# Allegro board production_board2_rev1.brd
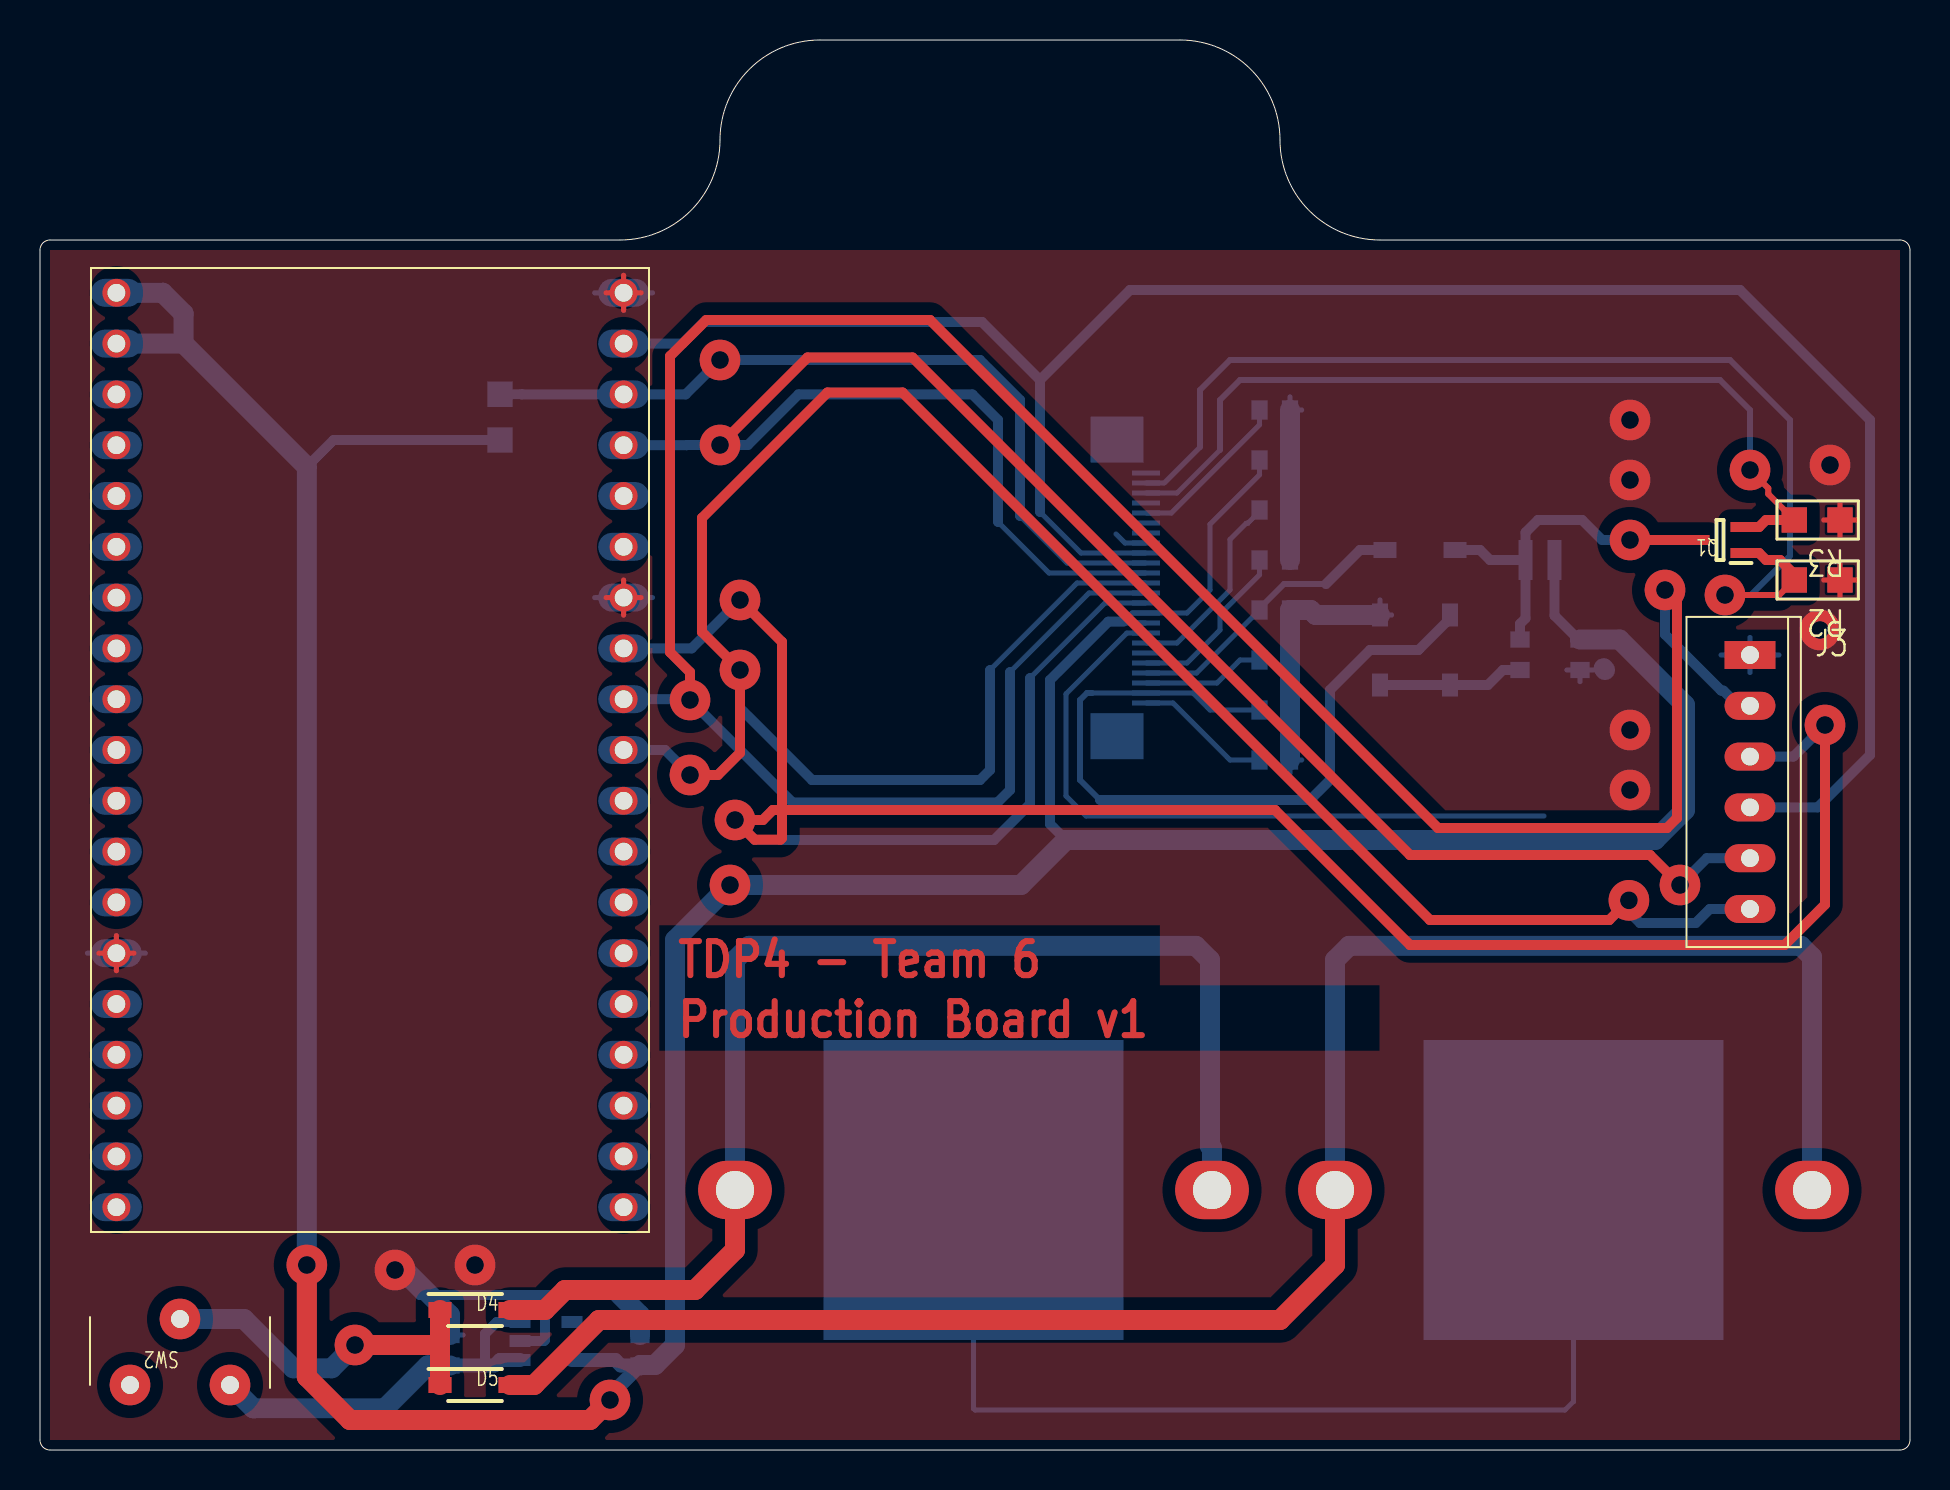
[diagram p0: board, top side]
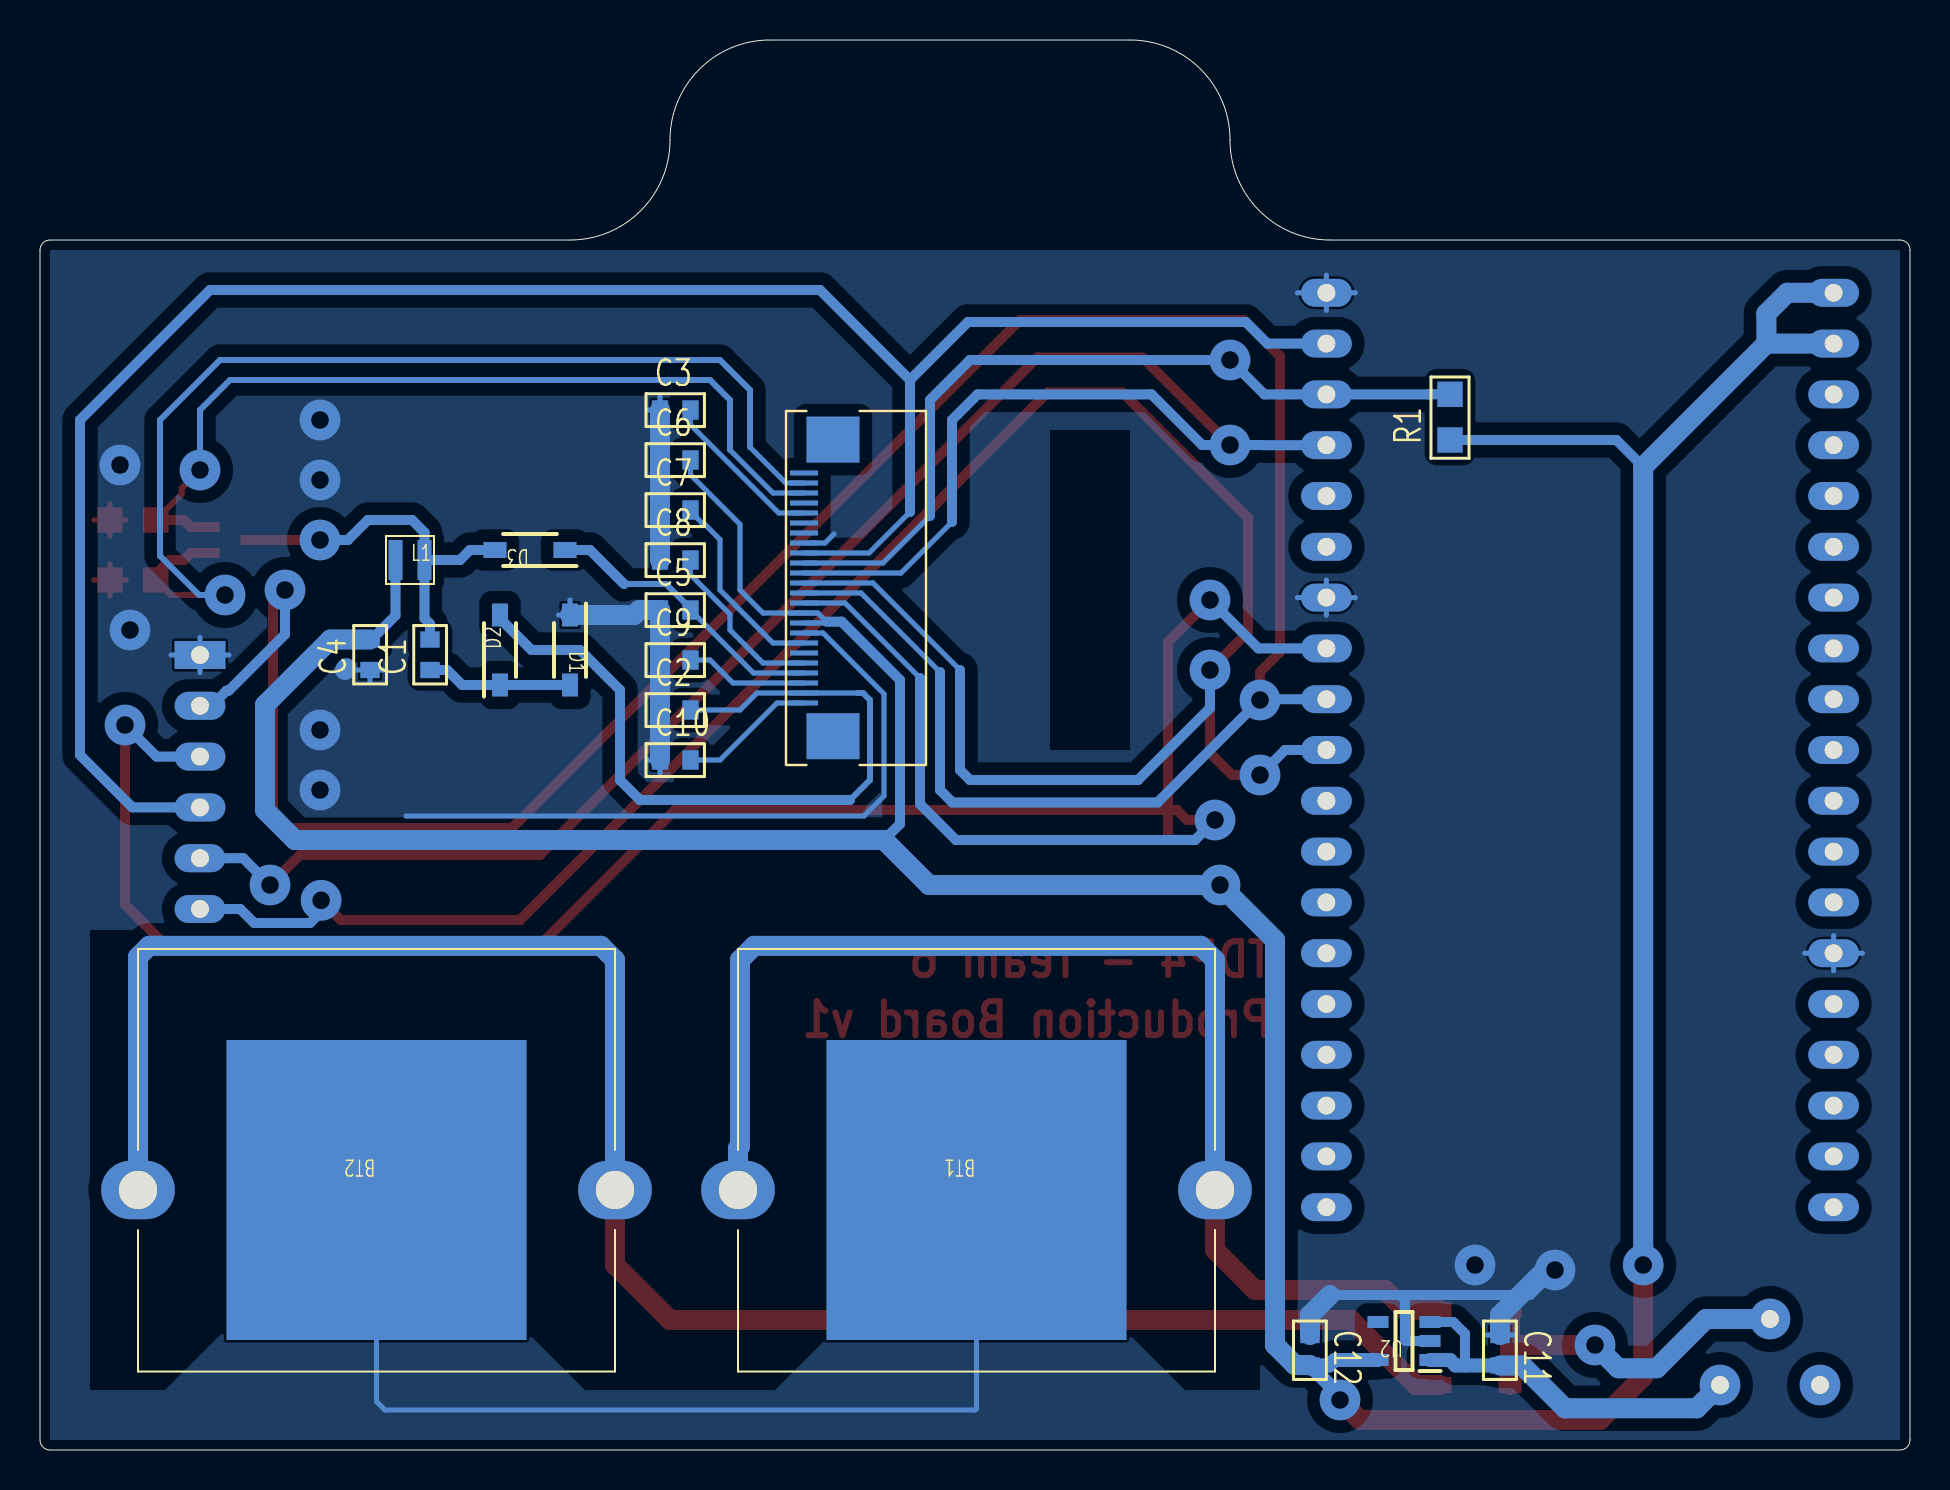
[diagram p1: board, bottom side, seen from below]

Outline 93.5 x 70.5 mm; copper layers: TOP, BOTTOM. Coordinates in mm from the lower left corner of the outline.
Outline path: 0,60 0,0.5 arc(0.15,0.15) 0.5,0 93,0 arc(93.35,0.15) 93.5,0.5 93.5,60 arc(93.35,60.35) 93,60.5 67,60.5 arc(63.46,61.96) 62,65.5 arc(60.54,69.04) 57,70.5 39,70.5 arc(35.46,69.04) 34,65.5 arc(32.54,61.96) 29,60.5 0.5,60.5 arc(0.15,60.35) 0,60

## Design rules (mm)
constraint set DEFAULT: min track width 0.254

## Placement (name value [footprint] x y rotation side)
BT1  Battery_Holder  [30212]  34.75 13 0 bottom
BT2  Battery_Holder  [30212]  64.75 13 0 bottom
C1  1u  [GU-C0603]  74 39 90 bottom
C2  1u / 50V  [GU-C0603]  62.5 37 180 bottom
C3  1u / 25V  [GU-C0603]  62.5 52 180 bottom
C4  4.7u  [GU-C0603]  77 39 90 bottom
C5  1u / 50V  [GU-C0603]  62.5 42 180 bottom
C6  1u / 25V  [GU-C0603]  62.5 49.5 180 bottom
C7  1u / 25V  [GU-C0603]  62.5 47 180 bottom
C8  1u / 25V  [GU-C0603]  62.5 44.5 180 bottom
C9  1u / 25V  [GU-C0603]  62.5 39.5 180 bottom
C10  1u / 25V  [GU-C0603]  62.5 34.5 180 bottom
C11  1u  [GU-C0603]  20.5 5.75 270 bottom
C12  1u  [GU-C0603]  30 5.75 270 bottom
D1  MBR0530T1  [SOD3716X135N]  67 40 270 bottom
D2  MBR0530T1  [SOD3716X135N]  70.5 40 90 bottom
D3  MBR0530T1  [SOD3716X135N]  69 45 0 bottom
D4  MBR0530T1  [SOD3716X135N]  21.75 7 0 top
D5  MBR0530T1  [SOD3716X135N]  21.75 3.25 0 top
J1  SFV24R-4STE1HLF  [AMPHENOL_SFV24R-4STE1HLF]  49.2 34.25 90 bottom
J3  SPI TP  [GU-MOLEX6]  85.5 39.75 0 top
L1  10uH  [NRH2412T2R2MNGH]  75 44.5 180 bottom
Q1  SI1308EDL-T1-BE3  [SOT65P210X110-3N]  84 45.5 180 top
R1  100k  [GU-R0805]  23 50.5 90 bottom
R2  10k  [GU-R0805]  90 43.5 180 top
R3  3R  [GU-R0805]  90 46.5 180 top
SW2  -  [SSSS213100]  4.5 3.25 180 top
U1  ESP32-DevKitC  [ESP32-DEVKITC]  16.5 35 0 top
U2  MIC5317-3.3YM5-TR  [SOT95P280X100-5N]  25.3 5.45 0 bottom

## Library data of the parts
BT1 BT2 = Battery_Holder_9
C1-C12 = C
D1-D5 = MBR0530T1
J1 = SFV24R-4STE1HLF_0
J3 = CON6
L1 = L
Q1 = SI1308EDL-T1-BE3
R1-R3 = R
SW2 = SSSS213100
U1 = ESP32-DevKitC
U2 = MIC5317-3.3YM5-TR

## Footprints (pads in the part's own frame, mm; a bottom-side part is the same pattern mirrored in y, then rotated)
30212
  oval 3.683x2.921 hole 1.905: 1(0,0) 2(23.85,0)
  rect 15x15 smd: NP1(11.925,0)
AMPHENOL_SFV24R-4STE1HLF
  rect 2.3x2.65 smd: (1.44,4.65) (16.27,4.65)
  rect 0.25x1.4 smd: 1(3.1,6.1) 2(3.6,6.1) 3(4.1,6.1) 4(4.6,6.1) 5(5.1,6.1) 6(5.6,6.1) 7(6.1,6.1) 8(6.6,6.1) 9(7.1,6.1) 10(7.6,6.1) 11(8.1,6.1) 12(8.6,6.1) 13(9.1,6.1) 14(9.6,6.1) 15(10.1,6.1) 16(10.6,6.1) 17(11.1,6.1) 18(11.6,6.1) 19(12.1,6.1) 20(12.6,6.1) 21(13.1,6.1) 22(13.6,6.1) 23(14.1,6.1) 24(14.6,6.1)
ESP32-DEVKITC
  round 1.397 hole 0.889: 1(-12.68,22.86) 2(-12.68,20.32) 3(-12.68,17.78) 4(-12.68,15.24) 5(-12.68,12.7) 6(-12.68,10.16) 7(-12.68,7.62) 8(-12.68,5.08) 9(-12.68,2.54) 10(-12.68,0) 11(-12.68,-2.54) 12(-12.68,-5.08) 13(-12.68,-7.62) 14(-12.68,-10.16) 15(-12.68,-12.7) 16(-12.68,-15.24) 17(-12.68,-17.78) 18(-12.68,-20.32) 19(-12.68,-22.86) 20(12.68,-22.86) 21(12.68,-20.32) 22(12.68,-17.78) 23(12.68,-15.24) 24(12.68,-12.7) 25(12.68,-10.16) 26(12.68,-7.62) 27(12.68,-5.08) 28(12.68,-2.54) 29(12.68,0) 30(12.68,2.54) 31(12.68,5.08) 32(12.68,7.62) 33(12.68,10.16) 34(12.68,12.7) 35(12.68,15.24) 36(12.68,17.78) 37(12.68,20.32) 38(12.68,22.86)
GU-C0603
  rect 0.813x0.965 smd: 1(0,0) 2(1.524,0)
GU-MOLEX6
  rect 2.54x1.397 hole 0.889: 1(0,0)
  oval 2.54x1.397 hole 0.889: 2(0,-2.54) 3(0,-5.08) 4(0,-7.62) 5(0,-10.16) 6(0,-12.7)
GU-R0805
  rect 1.27x1.27 smd: 1(0,0) 2(2.286,0)
NRH2412T2R2MNGH
  rect 0.7x2 smd: 1(-0.725,0) 2(0.725,0)
SOD3716X135N
  rect 1.15x0.8 smd: 1(-1.75,0) 2(1.75,0)
SOT65P210X110-3N
  rect 1.05x0.5 smd: 1(-1.05,0.65) 2(-1.05,-0.65) 3(1.05,0)
SOT95P280X100-5N
  rect 1.05x0.6 smd: 1(-1.3,0.95) 2(-1.3,0) 3(-1.3,-0.95) 4(1.3,-0.95) 5(1.3,0.95)
SSSS213100
  round 2.032 hole 0.889: 1(0,0) 2(-2.5,-3.3) 3(-5,0)

## Nets
3V3: C4.2 C6.2 C12.2 J1.9 J1.10 L1.1 R1.1 U1.1 U1.2 U2.5(VOUT)
GND: BT1.NP1 BT2.NP1 C2.1 C3.1 C4.1 C5.1 C6.1 C7.1 C8.1 C9.1 C10.1 C11.1 C12.1 D1.1(C) J1.8 J1.17 J3.1 R2.1 R3.1 U1.14 U1.32 U1.38 U2.2
VCC: C11.2 SW2.3(NO) U2.1 U2.3
BATT: D4.1(C) D5.1(C) SW2.2
BUSY: J1.16 J3.4 U1.37
DC: J1.14 J3.5 U1.35
E-INK_CS: J1.13 J3.6 U1.29
GDR: J1.23 Q1.1 R2.2
RESE: J1.22 Q1.2(S) R3.2
RESET: J1.15 R1.2 U1.36
SCL: J1.12 J3.2 U1.30
SDA: J1.11 J3.3 U1.31
VGH: C5.2 D3.1(C) J1.4
VGL: C2.2 D2.2 J1.2
N09940: C1.2 D3.2 L1.2 Q1.3
N26254: C1.1 D1.2 D2.1(C)
N26834: C10.2 J1.1
N27155: C9.2 J1.3
N27189: C8.2 J1.5
N27231: C7.2 J1.7
N27307: C3.2 J1.20
N72588: BT2.1 BT2.2 D5.2
N72605: BT1.1 BT1.2 D4.2

Pads without a net: J1 6 18 19 21 24; SW2 1; U1 3 4 5 6 7 8 9 10 11 12 13 15 16 17 18 19 20 21 22 23 24 25 26 27 28 33 34; U2 4

## Via types
v1: diameter 2.032, hole 0.889, TOP to BOTTOM, 26 vias

## Routing (per net, layer and track width the routed paths; a pad name or vN(x,y) marks a point on that pad's centre or on a via; arc(x,y) is an arc through that point)
3V3: length 214.3
  TOP w1: v1(13.34,9.25) 13.34,3.66 15.5,1.5 27.5,1.5 v1(28.5,2.5)
  BOTTOM w0.254: C6.2 60.98,48.76 58.5,46.29 58.5,43 57.35,41.85 J1.10 54.61,41.85 54.18,41.42 54.24,41.35 J1.9
  BOTTOM w0.5: C4.2 76.92,40.52 75.72,41.72 L1.1 ; R1.1 14.68,50.5 13.34,49.16 ; 54.18,41.42 53.42,41.42 50.5,38.5 50.5,31.3 51.3,30.5
  BOTTOM w0.7: U2.5 28.77,4.5 29.04,4.23 C12.2 28.5,2.73 v1(28.5,2.5)
  BOTTOM w1: C4.2 78.98,40.52 82.25,37.25 82.25,32 80.75,30.5 51.3,30.5 49.05,28.25 v1(34.5,28.25) 31.75,25.5 31.75,5.25 30.75,4.25 30.02,4.25 C12.2 ; U1.2 7.18,55.32 ; 7.18,55.32 13.34,49.16 v1(13.34,9.25) ; 7.18,55.32 7.18,56.82 6.14,57.86 U1.1
GND: length 172.9
  TOP w0.254: 29.18,41.74 U1.32 ; U1.32 28.3,42.62 ; U1.32 29.18,43.5 ; U1.32 30.06,42.62 ; U1.14 4.7,24.84 ; U1.14 3.82,23.96 ; U1.14 2.94,24.84 ; U1.14 3.82,25.72 ; R3.1 90.81,46.5 ; R3.1 90,45.69 ; R3.1 90,47.31 ; R3.1 89.19,46.5 ; 89.19,43.5 R2.1 ; R2.1 90,44.31 ; R2.1 90,42.69 ; R2.1 90.81,43.5 ; U1.38 29.18,58.74 ; U1.38 30.06,57.86 ; U1.38 29.18,56.98 ; U1.38 28.3,57.86
  BOTTOM w0.254: 85.5,38.87 J3.1 ; J3.1 84.05,39.75 ; J3.1 86.95,39.75 ; J3.1 85.5,40.63 ; 62.5,52.66 C3.1 63.08,52 ; U1.14 5.27,24.84 ; U1.14 3.82,23.96 ; U1.14 3.82,25.72 ; U1.14 2.37,24.84 ; U1.32 30.63,42.62 ; U1.32 29.18,41.74 ; U1.32 29.18,43.5 ; U1.32 27.73,42.62 ; C4.1 77.66,39 ; C4.1 77,38.42 ; C4.1 76.34,39 ; BT1.NP1 46.67,2.08 46.75,2 76.25,2 76.67,2.42 BT2.NP1 ; 63.08,34.5 C10.1 62.5,33.84 ; 67.58,41.75 D1.1 67,42.5 ; 21.16,5.75 C11.1 19.84,5.75 ; 29.18,56.98 U1.38 ; U1.38 27.73,57.86 ; U1.38 29.18,58.74 ; U1.38 30.63,57.86 ; 75.2,31.7 52.3,31.7 51.3,32.7 51.3,37.8 54.35,40.85 J1.8 ; J1.17 54.25,45.35 53.8,45.8
  BOTTOM w0.5: 25.5,7.75 19,7.75 v1(17.75,9) ; 25.5,7.75 25.25,7.5 25.25,5.5 25.2,5.45 U2.2 ; 25.5,7.75 29,7.75
  BOTTOM w1: 29,7.75 30,6.75 C12.1 ; C8.1 C7.1 C6.1 C3.1 ; C10.1 C2.1 C9.1 C5.1 63.53,42 63.78,41.75 D1.1 ; v1(17.75,9) 18.25,9 20.5,6.75 C11.1 ; 78.25,39 78.18,39.09
  vias: v1(21.75,9.25) v1(79.5,51.5) v1(79.5,48.5) v1(79.5,36) v1(79.5,33) v1(89,41) v1(89.5,49.25)
VCC: length 19.6
  BOTTOM w0.5: U2.3 22.84,6.4 22.25,5.81 22.25,4.23
  BOTTOM w0.7: U2.1 23,4.5 22.72,4.23 C11.2
  BOTTOM w1: C11.2 19.39,4.23 17.25,2.09 10.66,2.09 SW2.3
BATT: length 18.4
  TOP w1: 20,5 19.75,5.25 v1(15.75,5.25) ; 20,5 D5.1 ; 20,5 D4.1
  BOTTOM w1: SW2.2 10.2,6.55 12.66,4.09 14.59,4.09 v1(15.75,5.25)
BUSY: length 105.1
  BOTTOM w0.254: 50,46.9 52.05,44.85 J1.16
  BOTTOM w0.5: 50,53.5 54.5,58 85,58 91.5,51.5 91.5,34.75 88.88,32.13 J3.4 ; 50,53.5 47.1,56.4 33.21,56.4 32.13,55.32 U1.37 ; 50,53.5 50,46.9
DC: length 98.7
  TOP w0.5: v1(82,28.25) 80.5,29.75 68.5,29.75 43.62,54.63 38.38,54.63 v1(34,50.25)
  BOTTOM w0.254: 47.9,46.4 50.45,43.85 J1.14
  BOTTOM w0.5: 47.9,46.4 47.9,51.5 46.62,52.78 37.92,52.78 35.39,50.25 v1(34,50.25) 32.36,50.25 32.35,50.24 U1.35 ; J3.5 83.34,29.59 v1(82,28.25)
E-INK_CS: length 117.5
  TOP w0.5: v1(32.5,33.75) 33.89,33.75 35,34.86 v1(35,39) 33.1,40.9 33.1,46.6 39.38,52.88 43.12,52.88 69.5,26.5 78.46,26.5 v1(79.45,27.48)
  BOTTOM w0.254: J1.13 51.85,43.35 47.5,39
  BOTTOM w0.5: J3.6 83.49,27.05 82.79,26.35 80,26.35 79.5,26.85 79.5,27.43 v1(79.45,27.48) ; v1(32.5,33.75) 31.25,35 U1.29 ; v1(35,39) 35,37.1 38.6,33.5 47,33.5 47.5,34 47.5,39
GDR: length 55.7
  TOP w0.3: R2.2 86.96,42.75 v1(84.25,42.75)
  TOP w0.5: R2.2 87.71,43.79 87,44.5 86.3,44.5 85.95,44.85 Q1.1
  BOTTOM w0.254: J1.23 56.21,48.35 58,50.14
  BOTTOM w0.3: v1(84.25,42.75) 85.54,42.75 87.5,44.71 87.5,51.5 84.5,54.5 59.5,54.5 58,53 58,50.14
RESE: length 43.9
  TOP w0.3: v1(85.5,49) 86.41,48.09 86.41,47.8 R3.2
  TOP w0.5: Q1.2 85.95,46.15 86.3,46.5 R3.2
  BOTTOM w0.254: 59,50 56.85,47.85 J1.22
  BOTTOM w0.3: 59,50 59,52.5 60,53.5 84,53.5 85.5,52 v1(85.5,49)
RESET: length 40.6
  BOTTOM w0.254: J1.15 51.35,44.35 49,46.7
  BOTTOM w0.5: 49,46.7 49,52.5 47,54.5 v1(34,54.5) 32.28,52.78 U1.36 24.1,52.78 24.09,52.79 R1.2
SCL: length 135.1
  TOP w0.5: v1(81.25,43) 81.85,42.4 81.85,31.6 81.35,31.1 69.9,31.1 44.5,56.5 33.31,56.5 31.5,54.69 31.5,39.89 32.5,38.89 v1(32.5,37.5)
  BOTTOM w0.254: 48.5,38.9 52.45,42.85 J1.12
  BOTTOM w0.5: U1.30 32.46,37.54 v1(32.5,37.5) 37.62,32.38 47.88,32.38 48.5,33 48.5,38.9 ; v1(81.25,43) 81.25,40.78 84.06,37.97 84.17,37.97 84.93,37.21 J3.2
SDA: length 123.7
  TOP w0.5: v1(89.25,36.25) 89.25,27.27 87.23,25.25 68.5,25.25 61.75,32 36.64,32 36.14,31.5 v1(34.75,31.5) 35.73,30.52 37.01,30.52 37.1,30.6 37.1,40.4 v1(35,42.5)
  BOTTOM w0.254: 49.5,38.6 53.25,42.35 J1.11
  BOTTOM w0.5: v1(89.25,36.25) 87.67,34.67 J3.3 ; 49.5,38.6 49.5,32.3 47.7,30.5 35.75,30.5 v1(34.75,31.5) ; U1.31 32.58,40.08 v1(35,42.5)
VGH: length 14.5
  BOTTOM w0.254: J1.4 57.83,38.85 C5.2
  BOTTOM w0.3: C5.2 60.98,42.08 62.2,43.3 64.3,43.3
  BOTTOM w0.5: 64.3,43.3 66,45 D3.1
VGL: length 39
  BOTTOM w0.254: C2.2 58.5,37 57.65,37.85 J1.2 52.6,37.85
  BOTTOM w0.3: 53,32.5 52,33.5 52,37.5 52.35,37.85 52.6,37.85
  BOTTOM w0.5: D2.2 70.5,41.58 68.92,40 66.5,40 64.5,38 64.5,33.5 63.5,32.5 53,32.5
N09940: length 18.5
  TOP w0.5: Q1.3 v1(79.5,45.5)
  BOTTOM w0.5: L1.2 74.28,45.88 74.9,46.5 77.11,46.5 78.11,45.5 v1(79.5,45.5) ; L1.2 74.28,41.58 74,41.31 C1.2 ; L1.2 72.5,44.5 72,45 D3.2
N26254: length 7.3
  BOTTOM w0.5: D1.2 D2.1 72.39,38.25 73.14,39 C1.1
N26834: length 6.9
  BOTTOM w0.254: J1.1 56.65,37.35 59.5,34.5 C10.2
N27155: length 6.2
  BOTTOM w0.254: C9.2 60,39.5 58.85,38.35 J1.3
N27189: length 8.7
  BOTTOM w0.254: J1.5 57.35,39.35 59,41 59,41.79 60.98,43.76 C8.2
N27231: length 10
  BOTTOM w0.254: J1.7 56.85,40.35 59.5,43 59.5,45.52 60.31,46.34 60.39,46.34 60.98,46.92 C7.2
N27307: length 8.2
  BOTTOM w0.254: J1.20 56.56,46.85 60.98,51.26 C3.2
N72588: length 95
  TOP w1: BT2.1 64.75,9.25 62,6.5 27.95,6.5 24.7,3.25 D5.2
  BOTTOM w1: BT2.2 88.6,24.65 88.04,25.21 65.46,25.21 64.75,24.5 BT2.1
N72605: length 62.9
  TOP w1: D4.2 25.25,7 26.25,8 32.75,8 34.75,10 BT1.1
  BOTTOM w1: BT1.1 34.75,24.5 35.46,25.21 57.79,25.21 58.5,24.5 58.5,15.19 58.6,15.09 BT1.2

## Copper pours and planes (outline as drawn; the poured copper is in the pictures)
GND on TOP: 0.5,60 93,60 93,0.5 0.5,0.5
GND on BOTTOM: 0.5,60 93,60 93,0.5 0.5,0.5 ; 1 cut-out

## Text on the board
TOP: TDP4 - Team 6 | Production Board v1
